# EAGLE board FlipDotModulej (EAGLE 9.1.3)
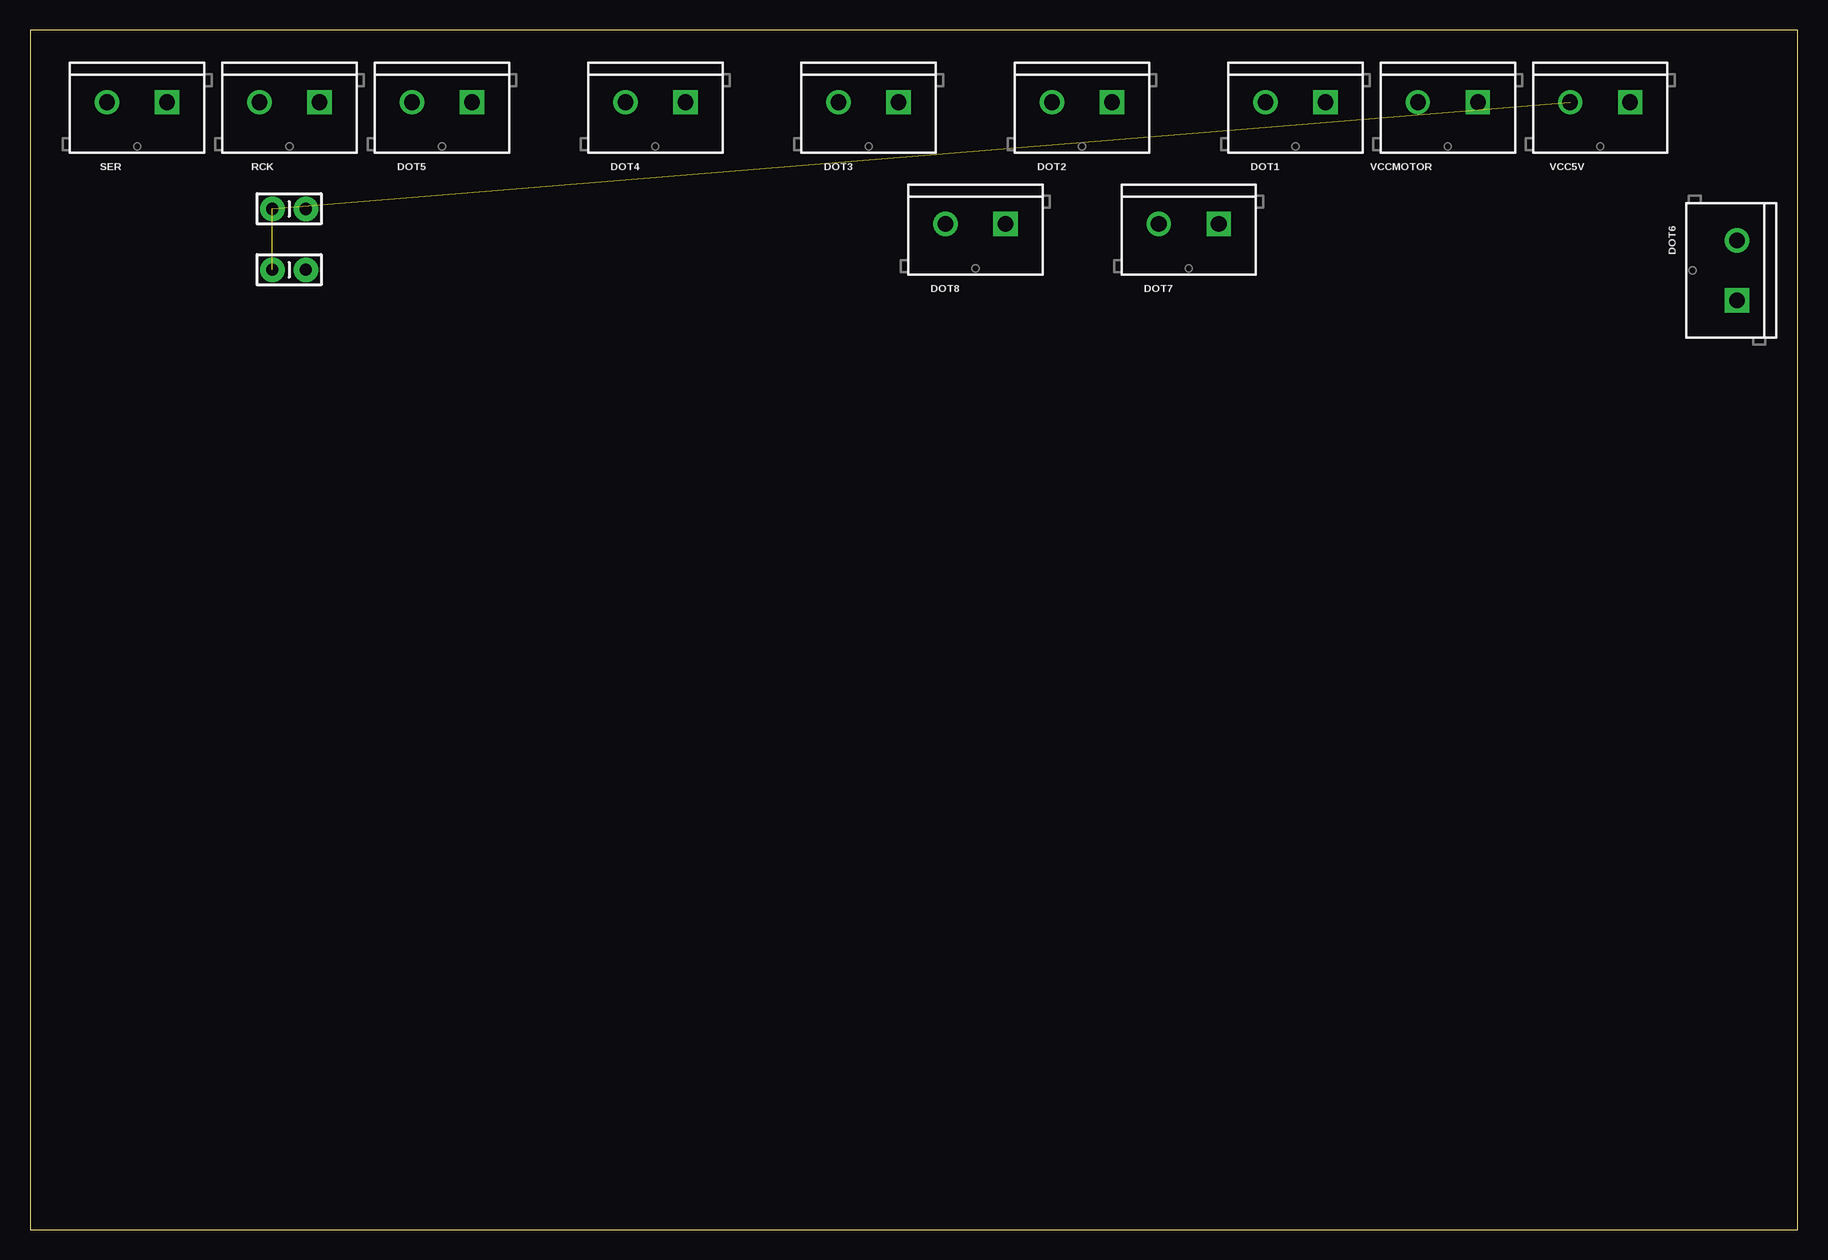
[diagram p0: board, top side]
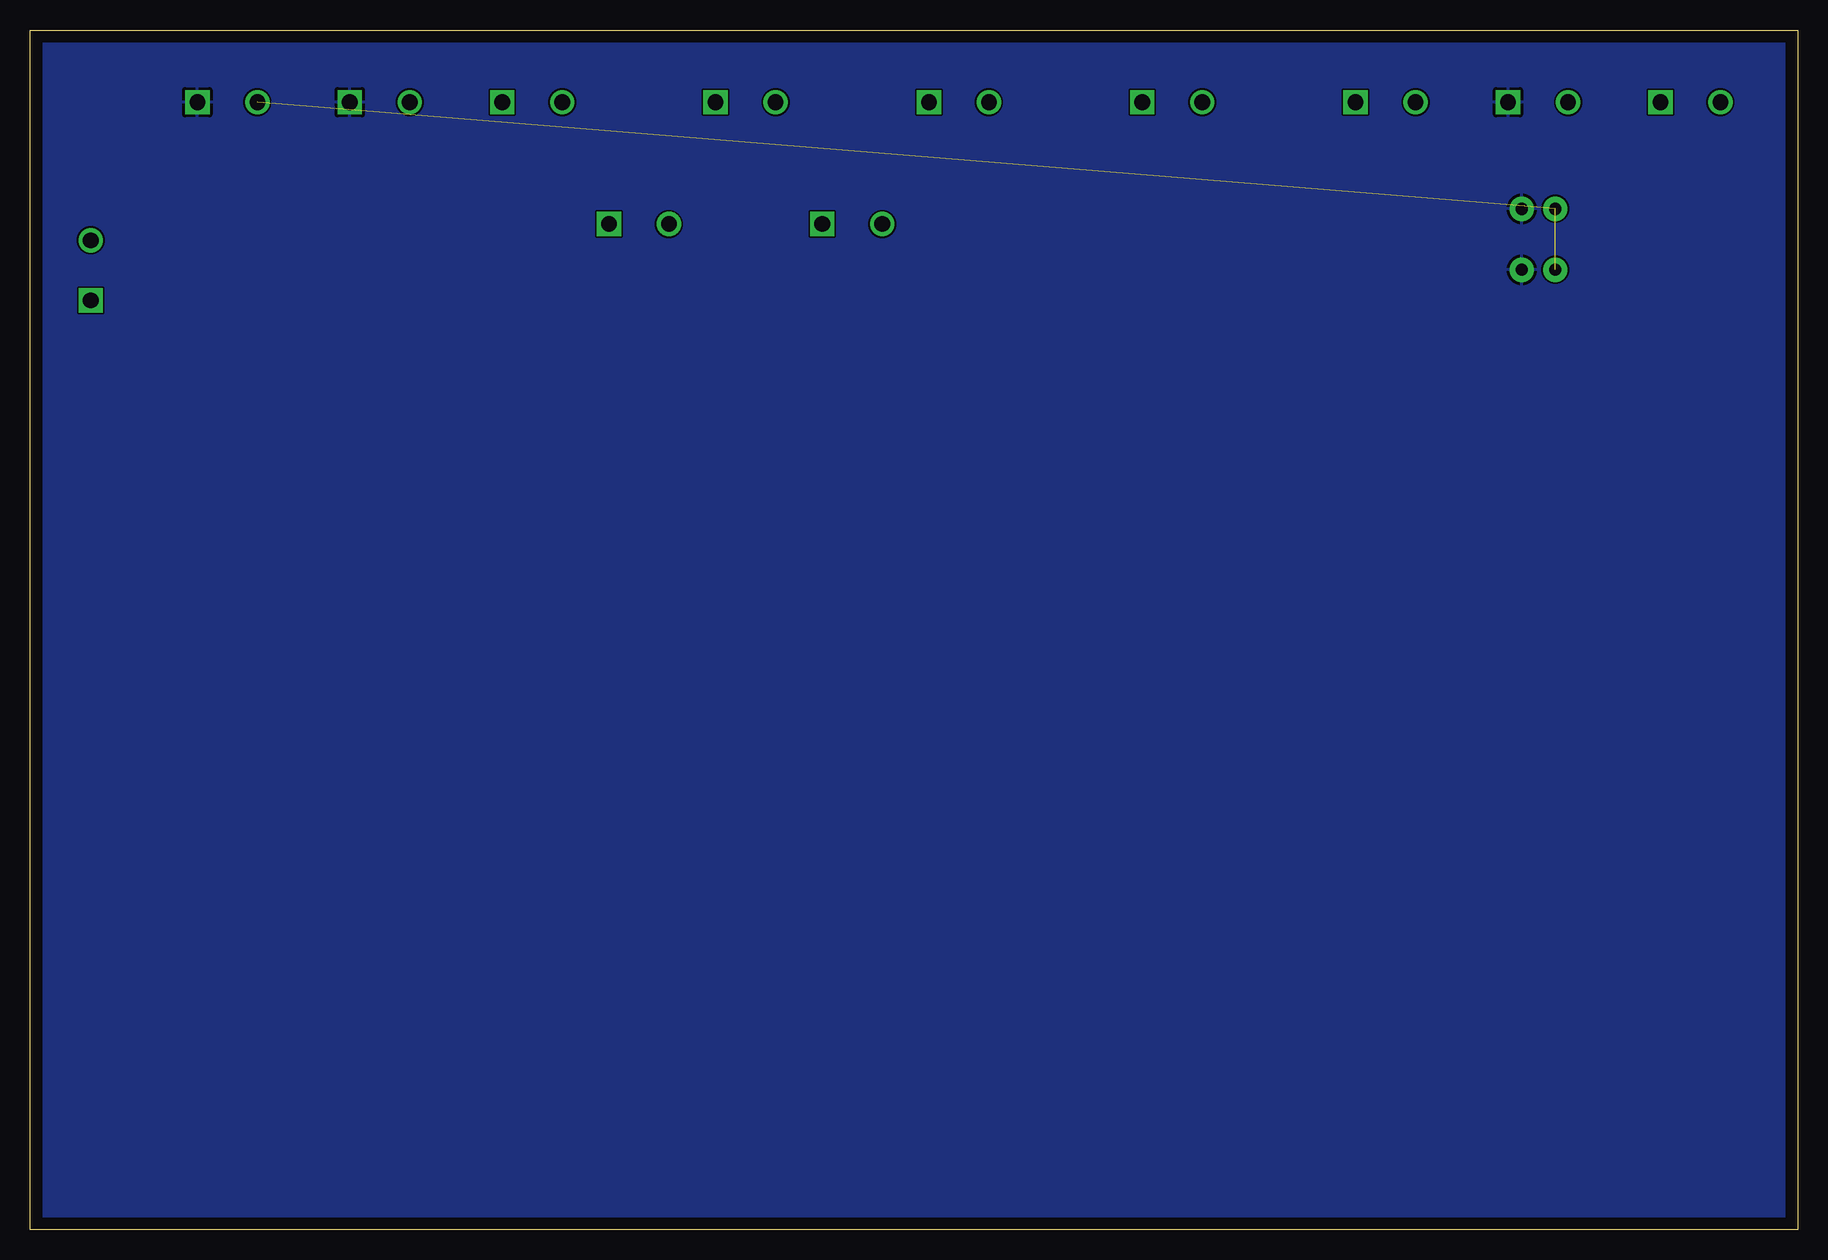
[diagram p1: board, bottom side, seen from below]

Size 147.3 x 100 mm. Coordinates in mm from the lower left corner, seen from the top.
Outline: 0,0 147.3,0 147.3,100 0,100 0,0
Copper layers (1*16): Top 0.035mm / dielectric 1.5mm / Bottom 0.035mm
Design rules "default": minimum track width 6mil, minimum drill 0.35mm, track to track 6mil, track to pad 6mil, pad to pad 6mil, via to via 6mil, smd to smd 6mil, copper to edge 40mil, drill to drill 6mil, minimum pad ring 10mil, minimum via ring 8mil, stop-mask expansion 4mil, vias tented up to drill 0mil, thermal gap 10mil

## Footprints (pad centres in the part's own frame; a part is rotated, then mirrored left to right if it is on the bottom)
CAP-PTH-SMALL-KIT = drill 1.016 pad 2.032: 1 -1.397,0; 2 1.397,0
SCREWTERMINAL-5MM-2 = drill 1.3 pad 2.032 square: 1 0,0 | drill 1.3 pad 2.032: 2 5,0

## Placement (x,y rotation side)
C1  0.1uF  [CAP-PTH-SMALL-KIT]  21.59,80.01 0 top
C2  0.1uF  [CAP-PTH-SMALL-KIT]  21.59,85.09 0 top
DOT1  [SCREWTERMINAL-5MM-2]  107.95,93.98 180 top
DOT2  [SCREWTERMINAL-5MM-2]  90.17,93.98 180 top
DOT3  [SCREWTERMINAL-5MM-2]  72.39,93.98 180 top
DOT4  [SCREWTERMINAL-5MM-2]  54.61,93.98 180 top
DOT5  [SCREWTERMINAL-5MM-2]  36.83,93.98 180 top
DOT6  [SCREWTERMINAL-5MM-2]  142.24,77.47 90 top
DOT7  [SCREWTERMINAL-5MM-2]  99.06,83.82 180 top
DOT8  [SCREWTERMINAL-5MM-2]  81.28,83.82 180 top
FRAME1  FRAME-LETTERNO_PACKAGE  [DUMMY]  3.81,78.74 0 top
RCK  [SCREWTERMINAL-5MM-2]  24.13,93.98 180 top
SER  SCK  [SCREWTERMINAL-5MM-2]  11.43,93.98 180 top
VCC5V  GND  [SCREWTERMINAL-5MM-2]  133.35,93.98 180 top
VCCMOTOR  GND  [SCREWTERMINAL-5MM-2]  120.65,93.98 180 top

## Library data of the parts
C1 C2 = SparkFun-Capacitors; PROD_ID: CAP-08370
DOT1-DOT8 RCK SER VCC5V VCCMOTOR = SparkFun-Connectors; SF_SKU: PRT-08432
FRAME1 = SparkFun-Aesthetics; DESIGNER: Nobody; VERSION: v01

## Nets
GND: C1.2 C2.2 RCK.1 VCC5V.1 VCCMOTOR.1
N$2: DOT5.2
N$6: SER.2
N$15: RCK.2
N$26: DOT1.2
N$27: DOT4.2
N$28: DOT2.1
N$29: DOT1.1
N$30: DOT3.2
N$31: DOT3.1
N$32: DOT2.2
N$33: DOT4.1
N$34: DOT5.1
N$35: DOT6.2
N$36: DOT6.1
N$37: DOT7.2
N$38: DOT7.1
N$39: DOT8.2
N$40: DOT8.1
VCC_1: C1.1 C2.1 VCC5V.2
VCC_2: VCCMOTOR.2

## Tracks (layer width: path | path; a pad name or v marks a point on that pad's centre or on a via)
GND
  pour Bottom: 0,99.06 0,0 147.32,0 147.32,99.06 147.32,100.33 1.27,100.33
VCC_1  (2 unrouted)